# Altium PCB SRM_DOUBLE_V2_POWER.PCBDOC (part 2 of 2)
Units mil, origin at the board's own origin, x right, y up, seen from the top; angles counter-clockwise.
Board outline 17360 x 20010 mil, 2 copper layers (Top Layer, Bottom Layer); 233 components, 244 nets, 635 pads, 83 vias.
Unrouted connection lines stored in the file: 49.
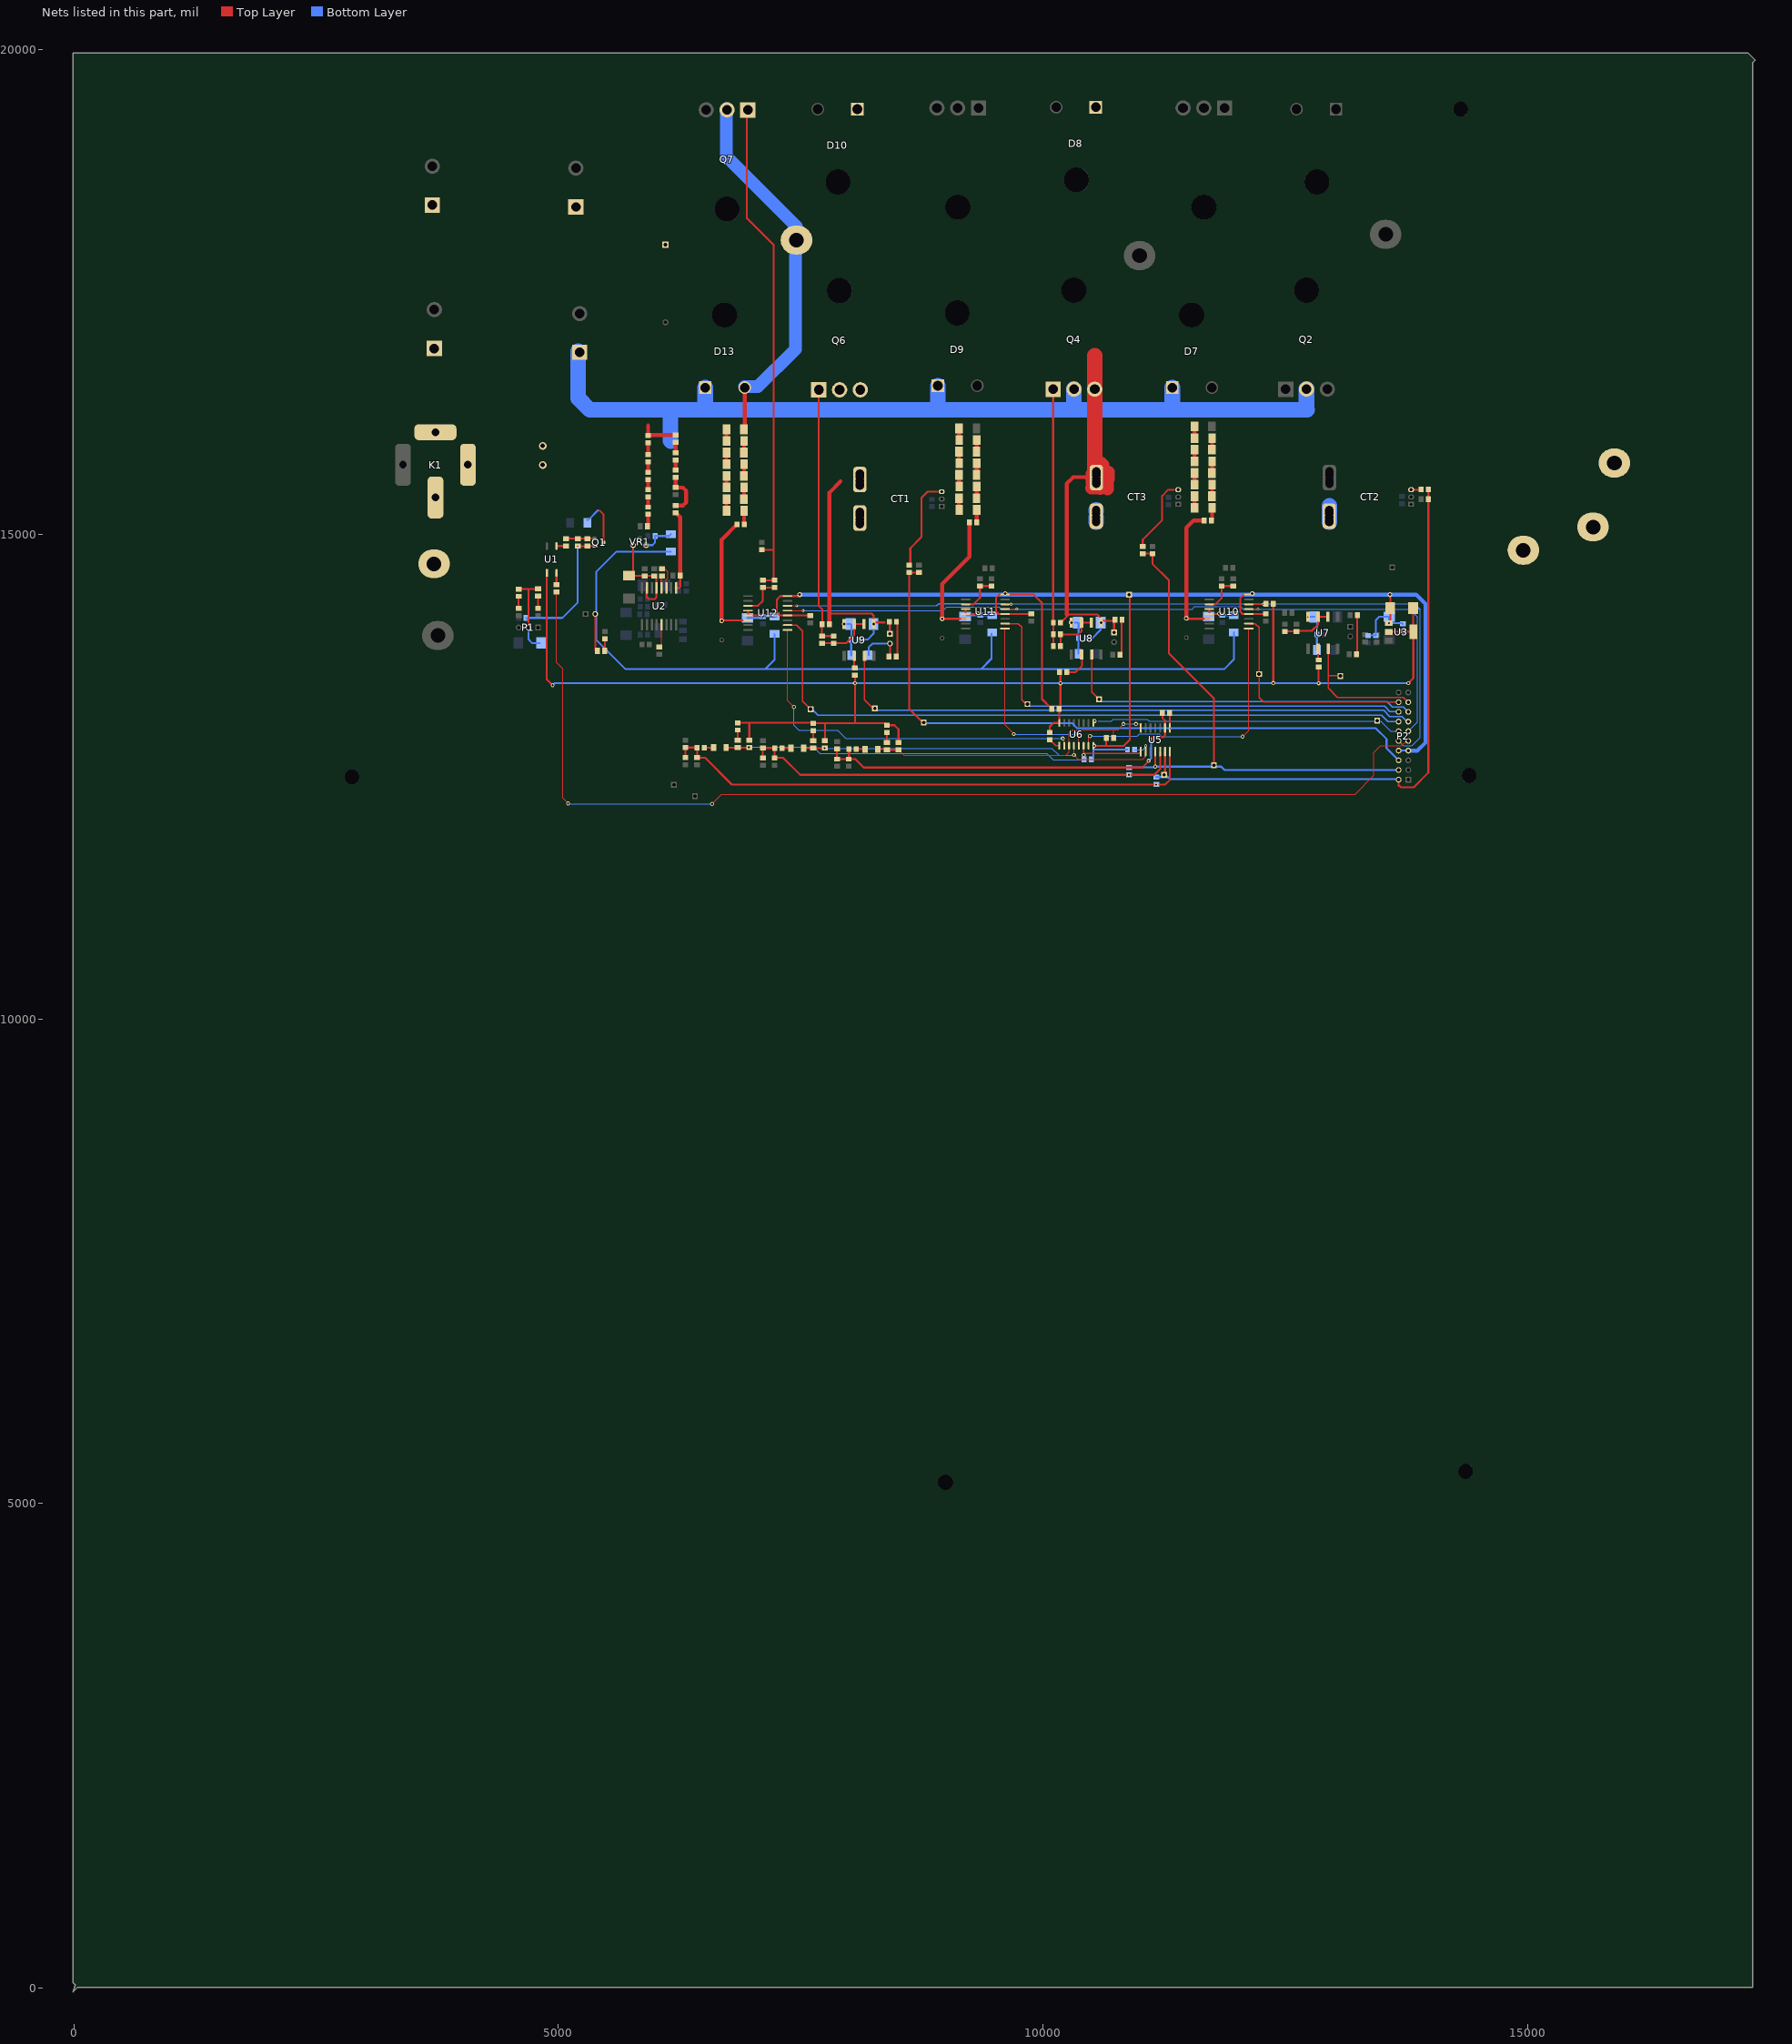
[diagram p2: the nets of this part, all layers, seen from the top]

## Via types
v1: diameter 40, hole 20, Top Layer to Bottom Layer, 55 vias
v2: diameter 50, hole 28, Top Layer to Bottom Layer, 17 vias
v3: diameter 30, hole 15, Top Layer to Bottom Layer, 10 vias
v4: diameter 20, hole 10, Top Layer to Bottom Layer, 1 vias

## Nets (pads, with @x,y where several pads share a name; then routed paths per layer and width w, separated by ;. In a path a pad name is that pad's centre, name@x,y a point inside that pad or via, vN(x,y) a via of type N, cw(c..) or ccw(c..) an arc to the next point about the centre after c; other vN are vias at no path point) (continued)
BP_G: Q4.1 R21.2 R48.1 R49.1 | length 2657.7
  Top Layer w20: R21.2@10105,14090 R21.2@10105,14092.6 ; Q4.1@10105,16504 R21.2@10105,14092.6 ; R49.1@10107.6,13850 R48.1@10107.6,13970 R21.2@10107.6,14090 R21.2@10105,14092.6
BP_S: C46.2 C49.2 CT3.4 D8.1 P4.1 Q4.3 R21.1 R45.1 U8.5 | length 4927.1
  Top Layer w20: R21.1@10182.4,14090 10250,14157.6 10250,14170 10250,14180 ; 10267.4,14175 10560,14175 10598.68,14136.32 v2(10598.68,14091.67) 10617.02,14110 R45.1@10727.6,14110 ; P4.1@10734,13990 10734,14107.4 R45.1@10736.6,14110
  Top Layer w40: 10250,14170 10245,14175 10245,15524 10313,15592 10461.39,15592 10484.19,15569.19 10496.69,15556.69 10507.69,15545.7 10518.49,15556.51 10528.49,15566.51 CT3.4@10543.99,15582.01
  Top Layer w130: CT3.4@10502.79,15480 10551,15480 10560,15480 10577.5,15497.5 10587.5,15507.5 10590,15510 10590,15475 10595,15480 10605,15490 10620,15505 10620,15524 10620,15544 10620,15575 10620,15611 ; CT3.4@10510,15535 10507.69,15537.31 10507.69,15544 10507.69,15545.7 10507.69,15575 CT3.4@10507.69,15582.01 ; CT3.4@10534.13,15591.87 CT3.4@10543.99,15582.01 ; CT3.4@10534.13,15636 CT3.4@10534.13,15650 ; CT3.4@10549.13,15590.87 CT3.4@10550,15590 ; CT3.4@10549.13,15636 CT3.4@10549.13,15650 ; CT3.4@10551,15575 CT3.4@10543.99,15582.01 ; CT3.4@10560,15611 10620,15611 ; 10590,15740 10600.77,15740 10620,15720.77 10620,15650 10620,15636 10620,15611 ; 10665,15470 10665,15524 10665,15544 10665,15561 10677,15573 10677,15575 10677,15611 10677,15636 10677,15645 10643,15611 10620,15611 ; CT3.4@10507.69,15582.01 10502.99,15582.01 CT3.4@10507.69,15586.7 ; CT3.4@10507.69,15582.01 CT3.4@10543.99,15582.01 ; CT3.4@10507.69,15582.01 CT3.4@10507.69,15586.7 ; CT3.4@10507.69,15586.7 10507.99,15587.01 10510,15589.01 10510,15611 10510,15630 10507.69,15627.69 10507.69,15611 CT3.4@10507.69,15586.7
  Top Layer w160: CT3.4@10534.13,15650 10534.13,16504 10534.13,16844.13
  Bottom Layer w20: C49.2@10442.4,13930 10510,13930 10596,14016 C46.2@10596,14091
CN_D: D13.3 D43.2 Q7.2 T9.1 | length 3908.7
  Top Layer w40: D43.2@6914,16085 6923,16094 D13.3@6923,16516
  Bottom Layer w130: Q7.2@6734,19396 6734,18900 7456.85,18177.15 T9.1@7456.85,18037.76 ; D13.3@6918,16525 7059,16525 7446,16912 T9.1@7446,18040
CN_G: Q7.1 R28.2 R62.1 R63.1 | length 5196
  Top Layer w20: Q7.1@6945,19381 6945,18265 7220,17990 ; R28.2@7100,14842.6 7219.8,14842.6 7222.4,14840 ; R62.1@7110,14527.4 R63.1@7230,14527.4 ; R63.1@7222.4,14535 7222.4,17982.6
CP1: P2.12 TP1.1 U6.9 | length 3177.9
  Bottom Layer w10: 10571.21,13075 10707,13075 10726,13094 11075,13094 11094,13075 TP1.1@13445.8,13075 ; TP1.1@13433,13092 13447.5,13077.5 13450,13075 13485,13075 13590,12970 P2.12@13670,12970
  other v1: 10535,13075
CP2: 
CP15V+: D22.1 D23.1 P5.2 | length 396.6
  Top Layer w20: P5.2@8421,13875 8422.6,13873.4 D23.1@8422.6,13755
  Bottom Layer w20: D22.1@8201,13755 8201,13834 8242,13875 8381,13875
CP_G: Q6.1 R25.2 R50.1 R51.1 | length 2669.8
  Top Layer w20: Q6.1@7685,16504 7685,14267.6 7722.6,14230 R25.2@7722.6,14075 ; R25.2@7720,14057.6 R51.1@7720,13952.4 R50.1@7840,13952.4
CP_S: C47.2 C50.2 CT1.4 D10.1 P5.1 Q6.3 R25.1 R52.1 U9.5 | length 2600
  Top Layer w20: 7797.4,14185 8230,14185 8253.68,14161.32 v2(8253.68,14076.67) 8269.42,14092.4 8367.12,14092.4 ; R52.1@8413.6,14092.4 R52.1@8421,14092.4 ; P5.1@8421,13975 R52.1@8421,14092.4 ; R52.1@8423.6,14095 8421.1,14092.5 R52.1@8421,14092.4
  Top Layer w40: R25.1@7797.4,14075 7797.4,14185 7797.4,15433.4 7911.5,15547.5
  Bottom Layer w20: C50.2@8097.4,13915 8190,13915 8253.68,13978.68 8253.68,14073.32 8252.01,14074.99 C47.2@8251,14076
D+3.3VA: C13.2 C15.1 C37.2 R29.2 R30.2 R31.2 R32.2 R33.2 R39.2 R40.2 R41.2 R42.2 R43.2 R54.2 U1.1 U3.2 U3.4 U6.16 | length 15429.5
  Top Layer w20: U1.1@4880,14605 4880,13505 v1(4940,13445) ; R32.2@6850,13057.4 6970,13057.4 ; R30.2@6970,12877.4 6970,13057.4 ; R29.2@7750,12872.4 7750,13052.4 ; R43.2@8060,13547.6 v1(8060,13465.72) 8060,13052.4 ; R39.2@8510,12852.4 8510,12990 8467.6,13032.4 R40.2@8390,13032.4 8370,13052.4 8060,13052.4 ; R33.2@10070,12957.4 10070,13015 10111.22,13056.22 U6.16@10170,13056.22 10167.4,13058.82 C37.2@10167.4,13200 10180,13212.6 v1(10180,13465) R42.2@10180,13572.6 ; v1(12377.4,13467.4) R54.2@12377.4,14285 ; v1(12845,13465) R41.2@12845,13610 ; U3.2@13570.06,13995.26 v1(13720,13995.26) U3.4@13822.94,13995.26 ; v1@13765,13460 v1(13770.72,13465.72) 13822.94,13517.94 U3.4@13822.94,13995.26 ; C15.1@13820,14241 13820,13999.54 U3.4@13823.61,13995.93 U3.4@13822.94,13995.26 ; 6970,13057.4 7625,13057.4 R31.2@7630,13052.4 7750,13052.4 ; 7750,13052.4 8060,13052.4
  Bottom Layer w20: v1(4940,13445) 4960.72,13465.72 v1(8060,13465.72) 10180,13465.72 12377.4,13465.72 12845,13465.72 v1(13770.72,13465.72) ; C13.2@13715,14002.6 C13.2@13720,14002.6
D+3.3VB: 
DA: C34.2 D12.1 D15.2 R30.1 U5.1 U6.6 | length 4458.9
  Top Layer w12: U6.6@10420,12820 v1@10420,12740 ; U5.1@11010,12760 10990,12740 v1@10420,12740 ; v1@10420,12730 10422.5,12727.5 10425,12725 v1(10420,12725) v1@10420,12730 ; v1@10420,12730 v1@10420,12740
  Top Layer w20: D12.1@6731,12800 6850,12800 6965,12800 6967.4,12800 6968.7,12801.3 R30.1@6970,12802.6
  Bottom Layer w10: v1(6965,12805) 7635,12805 7700,12740 10040,12740 10105,12675 10417.6,12675 C34.2@10422.6,12680
DB: C33.2 D11.1 D14.2 R29.1 U5.2 U6.4 | length 3884.9
  Top Layer w10: U6.4@10320,12820 v1(10320,12725) 10365,12680 11030,12680 11060,12710 U5.2@11060,12760
  Top Layer w20: D11.1@7531,12795 D14.2@7626.4,12795 ; D14.2@7630,12798.6 D14.2@7626.4,12795 ; R29.1@7750,12797.6 v1(7747.4,12795) 7630,12795 D14.2@7626.4,12795
  Bottom Layer w10: v1(7747.4,12795) 10090,12795 10165,12720 10315,12720 v1(10320,12725) ; C33.2@10947.4,12780 11035,12780 11055,12800 11055,12815 v3(11060,12820)
DC: C44.2 D16.1 D17.2 R39.1 U5.14 U6.3 | length 3111
  Top Layer w10: R39.1@8510,12777.6 8567.6,12720 10235,12720 10270,12755 U6.3@10270,12820 10270,12950 10306,12986 10727.4,12986 ; C44.2@10727.4,12900 10727.4,12986 ; v1@10830,13040 10776,12986 10727.4,12986 ; v1(10960,13045) U5.14@11010,13045 ; U5.14@11010,13004.09 U5.14@11010,13040
  Top Layer w20: D16.1@8295,12786 D16.1@8296,12785 8383.6,12785 D17.2@8390,12778.6 8509,12778.6 R39.1@8510,12777.6
  Bottom Layer w10: v1(10830,13045) v1(10960,13045)
DU: 
DV: 
DW: 
GND12: C5.2 C6.1 C7.2 D3.1 P1.2 Q1.2 R4.1 R5.1 | length 2321.7
  Top Layer w20: R5.1@4590,14437.4 4789,14437.4 D3.1@4790,14438.4 ; P1.2@4690,14040 4690,14437.4 ; v4(5200,14880) 5297.4,14880 C6.1@5300,14882.6 Q1.2@5372.76,14882.6
  Bottom Layer w20: C5.2@4667.4,14140 C5.2@4690,14117.4 ; P1.2@4690,14030 4690,13921 4733,13878 C7.2@4810,13878 ; P1.2@4690,14040 C5.2@4690,14155 ; C5.2@4690,14140 5040,14140 5200,14300 v4(5200,14880)
GNDA: C13.1 C15.2 C16.1 C20.1 C24.2 C33.1 C34.1 C37.1 C44.1 C51.1 C52.1 C53.1 P2.7 P2.8 T8.1 U3.1 U6.8 U10.4 U10.8 U11.4 U11.8 U12.4 U12.8 | length 14983.6
  Top Layer w20: v2(7490,14380) 7475,14365 U12.8@7365,14365 7290,14365 7255,14330 7255,14195 7285,14165 U12.4@7365,14165 7597.4,14165 C53.1@7600,14162.4 ; C52.1@9880,14180 C52.1@9877.6,14180 ; C52.1@9880,14182.4 C52.1@9877.6,14180 ; C37.1@10092.6,13200 9990,13302.6 9990,14295 9905,14380 U11.8@9610,14380 9550,14380 9515,14345 9515,14205 9540,14180 U11.4@9610,14180 C52.1@9877.6,14180 ; U6.8@10520,12820 v1(10530,12820) 10835,12820 10895,12880 T8.1@10895,14380 ; 10652.6,12822.4 C44.1@10652.6,12900 ; U10.8@12125,14380 12075,14380 12035,14340 12035,14205 12060,14180 U10.4@12125,14180 12297.6,14180 C51.1@12300,14182.4 ; v2(13580,14380) 13584,14376 C15.2@13584,14241 U3.1@13584,14104
  Bottom Layer w20: C34.1@10520,12702.6 10520,12785 ; v1@10520,12815 10520,12785 ; C33.1@10872.6,12780 10525,12780 10520,12785 ; 13390,13957.4 C16.1@13435,13957.4 13435,14115 13471,14151 C24.2@13574,14151 13570.06,14147.06 v1(13570.06,14085.81) 13706.59,14085.81 C13.1@13715,14077.4 ; P2.8@13670,12770 P2.7@13770,12770
  Bottom Layer w40: v2(7490,14380) 9610,14380 T8.1@10890,14380 12160,14380 v2(13580,14380) 13850,14380 13950,14280 13950,12855 13865,12770 P2.7@13770,12770
  other v2: 9610,14390 12160,14390
GNDB: 
IA: C30.1 C40.2 P2.2 R37.2 T14.1 U5.6 | length 6134.4
  Top Layer w20: T14.1@11260,12520 U5.6@11260,12760 ; 13670,12405 P2.2@13670,12470 ; 13680,12405 13695,12390 13825,12390 13977.4,12542.4 C40.2@13977.4,15365 R37.2@13977.4,15465
  Bottom Layer w20: C30.1@11170,12497.4 11250,12497.4 11283.68,12497.4 11285.64,12499.36 ; T14.1@11265,12520 11285.64,12499.36 ; P2.2@13670,12475 11310,12475 11285.64,12499.36
IB: C29.1 C42.2 P2.4 R38.2 T15.1 U5.4 | length 5537.4
  Top Layer w20: R38.2@11010,14802.6 R38.2@11030,14802.6 C42.2@11130,14802.6 11130,14697.6 11300,14527.6 11300,13775 11765,13310 T15.1@11765,12620 T15.1@11765,12605 ; v1(11160,12605) U5.4@11160,12760
  Bottom Layer w20: C29.1@10890,12597.4 11142.4,12597.4 11155,12610 v1(11160,12605) 11765,12605 11840,12605 11875,12570 P2.4@13670,12570
IC: C35.1 C38.2 P2.6 R36.2 T13.1 U5.8 | length 6988.8
  Top Layer w20: C38.2@8720,14607.6 R36.2@8620,14607.6 8620,13200 8765,13055 T13.1@8770,13055 ; C35.1@11307.4,13160 11310,13157.4 U5.8@11310,13004.09
  Bottom Layer w20: T13.1@8770,13052.6 10302.4,13052.6 10355,13000 v3(11310,13000) 13435,13000 13545,12890 13545,12795 P2.6@13670,12670
IPU+: 
IPV+: 
IPW+: 
IU: 
IV: 
IW: 
N15V+: D1.1 D24.1 D25.1 D26.1 D27.1 P6.2 | length 9773.8
  Top Layer w20: D24.1@5381.6,13800 P6.2@5381.6,14179
  Bottom Layer w20: D1.1@6160,14824 5599,14824 5390,14615 5390,14180 5390,13915 5695,13610 9361,13610 ; 7135,13612 7230,13707 D27.1@7230,13974 ; D26.1@9470,13975 9470,13719 9361,13610 ; D25.1@11970,13989 11970,13710 11870,13610 9361,13610
NetC1_1: C1.1 U2.4 | length 127.2
  Top Layer w12: U2.4@6059,14450 6059,14561.6 C1.1@6070,14572.6
NetC1_2: C1.2 U2.3 | length 247.1
  Top Layer w10: C1.2@6070,14647.4 6097.6,14647.4 6130,14615 6130,14553.01 6109,14532.01 U2.3@6109,14450
NetC2_2: C2.2 D1.2 VR1.1 | length 341.8
  Bottom Layer w20: VR1.1@5905,14890 5970,14890 5997.4,14917.4 C2.2@5997.4,14985 6141,14985 D1.2@6160,15004
NetC4_1: C4.1 R2.2 U2.1 | length 836
  Top Layer w20: U2.1@6209,14450 U2.1@6214,14450 6245,14450 6257.4,14462.4 C4.1@6257.4,14575
  Top Layer w40: R2.2@6210,15225.2 6257.4,15177.79 C4.1@6257.4,14575
NetC6_2: C6.2 Q1.1 R3.1 R4.2 | length 292.8
  Top Layer w20: R3.1@5080,14957.4 R4.2@5200,14957.4 C6.2@5300,14957.4 Q1.1@5372.76,14957.4
NetC17_1: C17.1 C18.1 C19.1 C22.1 C25.2 D7.1 D9.1 D13.1 K1.1 Q2.2 Q4.2 Q6.2 R7.1 R10.2 R18.1 | length 9682.7
  Top Layer w40: R18.1@5925,16022.4 5920,16027.4 5925,16027.4 6207.6,16027.4 R10.2@6210,16025 ; 5925,16057.4 5925,16125
  Bottom Layer w160: C17.1@5205,16893 5205,16406 5326,16285 12725,16285 12719.57,16290.43 Q2.2@12719.57,16504 ; 6155,16230 6155,15970 6160,15965 ; 6515,16360 D13.1@6515,16516 ; 8915,16320 D9.1@8915,16536 ; 10319.57,16300.43 Q4.2@10319.57,16504 ; 11335,16320 D7.1@11335,16516
NetC29_2: C29.2 C31.2 R26.2 R102.2 R103.1 U5.5 | length 4572.6
  Top Layer w20: R103.1@7110,12692.4 7110,12782.6 7117.5,12790.1 7125,12797.6 R26.2@7230,12797.6 ; C31.2@7230,12692.4 7230,12795 R26.2@7230,12797.6 ; R26.2@7232.6,12795 R26.2@7230,12797.6 ; C31.2@7240,12695 7320,12695 7495,12520 v1(10885,12520) 11150,12520 11210,12580 U5.5@11210,12760
NetC30_2: C30.2 C32.2 R27.2 R100.2 R101.1 U5.7 | length 5638.2
  Top Layer w20: R101.1@6310,12697.4 R100.2@6310,12802.6 6430,12802.6 R27.2@6432.6,12800 6432.6,12700 C32.2@6430,12697.4 6512.6,12697.4 6790,12420 v1(11170,12420) 11260,12420 11310,12470 U5.7@11310,12760
NetC35_2: C35.2 C36.2 R35.2 R104.2 R105.1 U5.9 | length 4134.6
  Top Layer w20: R104.2@7875,12787.6 R105.1@7875,12682.4 C36.2@7995,12682.4 ; R35.2@7997.6,12785 7997.6,12685 C36.2@7995,12682.4 ; v1(11090,12665) 11090,12660 11025,12595 8150,12595 8062.6,12682.4 C36.2@7995,12682.4 ; v1(11105,12882) 11131,12908 11238,12908 11260,12930 U5.9@11260,13004.09 11260,13080 11232.6,13107.4 C35.2@11232.6,13160
  Bottom Layer w20: v1(11090,12665) 11115,12690 v1@11115,12881
NetC45_1: C45.1 C48.1 D20.2 U7.8 | length 379.7
  Bottom Layer w20: v3(12735,14150) C45.1@12800.65,14150 ; D20.2@12827.31,13808.33 12827.31,13966.73 C48.1@12828.91,13968.33 C45.1@12828.91,14121.73
NetC46_1: C46.1 C49.1 D21.2 U8.8 | length 380.7
  Bottom Layer w20: v2(10293.68,14091.67) 10359.33,14091.67 C46.1@10360,14091 ; D21.2@10366,13770 10366,13928.4 C49.1@10367.6,13930 C46.1@10367.6,14083.4
NetC47_1: C47.1 C50.1 D22.2 U9.8 | length 391.4
  Bottom Layer w20: v2(7948.68,14076.67) 8014.33,14076.67 C47.1@8015,14076 8022.6,14068.4 C50.1@8022.6,13915 8021,13913.4 D22.2@8021,13755
NetC54_1: C54.1 R55.2 U10.14 | length 1387.9
  Top Layer w20: C54.1@11480,14135 11485,14130 U10.14@11717.13,14130
  Top Layer w40: C54.1@11480,14135 11480,15070 11555,15145 R55.2@11662.6,15145
NetC55_2: C55.2 C60.1 D25.2 U10.12 U10.13 | length 413.7
  Top Layer w20: U10.12@11717.13,14230 U10.13@11717.13,14180 11815,14180 v2(11820,14185)
  Bottom Layer w20: C60.1@11717.13,14180 11820,14180 11837.4,14180 C55.2@11850,14167.4 11968.4,14167.4 D25.2@11970,14169
NetC56_1: C56.1 R56.2 U11.14 | length 1354.2
  Top Layer w20: C56.1@8960,14130 U11.14@9202.13,14130
  Top Layer w40: C56.1@8960,14130 8960,14490 9242.6,14772.6 R56.2@9242.6,15125
NetC57_2: C57.2 C61.1 D26.2 U11.12 U11.13 | length 435.9
  Top Layer w20: U11.12@9202.13,14230 U11.13@9202.13,14180 9320,14180 v2(9325,14185)
  Bottom Layer w20: C61.1@9214.72,14167.4 9325,14167.4 C57.2@9355,14167.4 9473.4,14167.4 D26.2@9475,14169
NetC58_1: C58.1 R57.2 U12.14 | length 1334.5
  Top Layer w20: C58.1@6685,14110 6690,14115 U12.14@6957.13,14115
  Top Layer w40: C58.1@6685,14110 6685,14947.4 R57.2@6842.6,15105
NetC59_2: C59.2 C62.1 D27.2 U12.12 U12.13 | length 459.7
  Top Layer w20: U12.12@6957.13,14215 U12.13@6957.13,14165 7075,14165 v2(7080,14160)
  Bottom Layer w20: C62.1@6951,14140 7080,14140 7097.6,14140 7098.8,14141.2 C59.2@7110,14152.4 7228.4,14152.4 D27.2@7230,14154
NetC63_2: 
NetC67_1: 
NetC76_2: 
NetC77_2: 
NetC82_2: 
NetC92_1: 
NetC93_1: 
NetC94_1: 
NetC101_1: 
NetC102_2: 
NetC103_1: 
NetC104_2: 
NetC105_1: 
NetC106_2: 
NetCT1_3: CT1.3 R36.1 | length 923.5
  Top Layer w20: R36.1@8631.02,14693.43 8631.02,14858.02 8747,14974 8747,15378 8810.85,15441.85 8911.46,15441.85
NetCT1_5: C+.1 CT1.5
NetCT2_3: CT2.3 R37.1 | length 103.9
  Top Layer w20: CT2.3@13800,15461.85 13899.45,15461.85 R37.1@13902.6,15465
NetCT2_5: A+.1 CT2.5 | length 316
  Bottom Layer w130: CT2.5@12955,15147 CT2.5@12955,15178 CT2.5@12955,15214 CT2.5@12955,15239 CT2.5@12955,15253 CT2.5@12955,15295
  Bottom Layer w160: CT2.5@12955,15127 CT2.5@12955,15147 CT2.5@12955,15178 CT2.5@12955,15214 CT2.5@12955,15239 CT2.5@12955,15253 CT2.5@12955,15295
NetCT3_3: CT3.3 R38.1 | length 753.7
  Top Layer w20: R38.1@11020,14875 R38.1@11020,14877.4 ; R38.1@11030,14877.4 11030,14948 11231,15149 11231,15399 11293.85,15461.85 11351.46,15461.85
NetCT3_5: B+.1 CT3.5 | length 116
  Bottom Layer w130: CT3.5@10550,15127 CT3.5@10550,15147 CT3.5@10550,15178
  Bottom Layer w160: CT3.5@10550,15127 CT3.5@10550,15147 CT3.5@10550,15178 ; CT3.5@10550,15239 CT3.5@10550,15253
NetCT4_3: 
NetCT4_5: 
NetCT5_3: 
NetCT5_5: 
NetCT6_3: 
NetCT6_5: 
NetD2_2: D2.2 R5.2 | length 126.2
  Top Layer w20: D2.2@4590,14236.4 R5.2@4590,14362.6
NetD3_2: D3.2 R6.2 | length 126.2
  Top Layer w20: R6.2@4790,14237.4 D3.2@4790,14363.6
NetD4_1: D4.1 K1.3 Q1.3 | length 502.3
  Top Layer w20: 5425,15246 5467.24,15203.76 Q1.3@5467.24,14920
  Bottom Layer w20: D4.1@5293,15150 5301,15150 5309,15150 5410,15251
NetD5_1: D5.1 R15.1 | length 123.3
  Top Layer w40: R15.1@5925,15207.6 5925,15086.6 D5.1@5926.6,15085
NetD11_2: D11.2 R26.1 | length 93.6
  Top Layer w20: R26.1@7307.4,12795 D11.2@7401,12795
NetD12_2: D12.2 R27.1 | length 93.6
  Top Layer w20: R27.1@6507.4,12800 D12.2@6601,12800
NetD14_1: D14.1 R31.1 | length 104.2
  Top Layer w20: D14.1@7630,12873.4 R31.1@7630,12977.6
NetD15_1: D15.1 R32.1 | length 104.2
  Top Layer w20: D15.1@6850,12878.4 R32.1@6850,12982.6
NetD16_2: D16.2 R35.1 | length 93.6
  Top Layer w20: R35.1@8072.4,12785 D16.2@8166,12785
NetD17_1: D17.1 R40.1 | length 104.2
  Top Layer w20: D17.1@8390,12853.4 R40.1@8390,12957.6
NetD18_2: D18.2 R44.2 | length 406.4
  Top Layer w20: D18.2@13236.4,13765 13242.72,13771.31 13242.72,14167.33 R44.2@13243.72,14168.33
NetD19_2: D19.2 R45.2 | length 340.4
  Top Layer w20: D19.2@10810.4,13770 10810.4,14109 R45.2@10811.4,14110
NetD23_2: D23.2 R52.2 | length 340.4
  Top Layer w20: D23.2@8497.4,13755 8497.4,14094 R52.2@8498.4,14095
NetD24_2: D24.2 R53.2 | length 124.1
  Top Layer w20: D24.2@5476.4,13800 5480,13803.6 R53.2@5480,13922.6
NetD28_1: D28.1 D29.2 | length 120.8
  Top Layer w40: D29.2@11744,15875 11746,15877 D28.1@11746,15995
NetD28_2: D28.2 D37.1 | length 120.8
  Top Layer w40: D37.1@11564,16115 11564,15997 D28.2@11566,15995
NetD29_1: D29.1 D38.2 | length 120.8
  Top Layer w40: D29.1@11564,15875 11564,15757 D38.2@11566,15755
NetD30_1: D30.1 R55.1 | length 133.6
  Top Layer w40: R55.1@11737.4,15145 11746,15153.6 D30.1@11746,15275
NetD30_2: D30.2 D39.1 | length 120.8
  Top Layer w40: D39.1@11564,15395 11564,15277 D30.2@11566,15275
NetD31_1: D31.1 D32.2 | length 120.8
  Top Layer w40: D32.2@9314,15855 9316,15857 D31.1@9316,15975
NetD31_2: D31.2 D40.1 | length 120.8
  Top Layer w40: D40.1@9134,16095 9134,15977 D31.2@9136,15975
NetD32_1: D32.1 D41.2 | length 120.8
  Top Layer w40: D32.1@9134,15855 9134,15737 D41.2@9136,15735
NetD33_1: D33.1 R56.1 | length 123
  Top Layer w40: R56.1@9315,15132.4 9316,15133.4 D33.1@9316,15255
NetD33_2: D33.2 D42.1 | length 120.8
  Top Layer w40: D42.1@9134,15375 9134,15257 D33.2@9136,15255
NetD34_1: D34.1 D35.2 | length 120.8
  Top Layer w40: D35.2@6914,15845 6916,15847 D34.1@6916,15965
NetD34_2: D34.2 D43.1 | length 120.8
  Top Layer w40: D43.1@6734,16085 6734,15967 D34.2@6736,15965
NetD35_1: D35.1 D44.2 | length 131.2
  Top Layer w40: D35.1@6735,15855 6735,15846 D35.1@6734,15845 6734,15727 D44.2@6736,15725
NetD36_1: D36.1 R57.1 | length 123
  Top Layer w40: R57.1@6915,15122.4 6916,15123.4 D36.1@6916,15245
NetD36_2: D36.2 D45.1 | length 120.8
  Top Layer w40: D45.1@6734,15365 6734,15247 D36.2@6736,15245
NetD38_1: D38.1 D46.2 | length 120.8
  Top Layer w40: D46.2@11744,15635 11746,15637 D38.1@11746,15755
NetD39_2: D39.2 D47.1 | length 120.8
  Top Layer w40: D39.2@11744,15395 11746,15397 D47.1@11746,15515
NetD41_1: D41.1 D48.2 | length 120.8
  Top Layer w40: D48.2@9314,15615 9316,15617 D41.1@9316,15735
NetD42_2: D42.2 D49.1 | length 120.8
  Top Layer w40: D42.2@9314,15375 9316,15377 D49.1@9316,15495
NetD44_1: D44.1 D50.2 | length 120.8
  Top Layer w40: D50.2@6914,15605 6916,15607 D44.1@6916,15725
NetD45_2: D45.2 D51.1 | length 120.8
  Top Layer w40: D45.2@6914,15365 6916,15367 D51.1@6916,15485
NetD46_1: D46.1 D47.2 | length 120.8
  Top Layer w40: D46.1@11564,15635 11564,15517 D47.2@11566,15515
NetD48_1: D48.1 D49.2 | length 120.8
  Top Layer w40: D48.1@9134,15615 9134,15497 D49.2@9136,15495
NetD50_1: D50.1 D51.2 | length 120.8
  Top Layer w40: D50.1@6734,15605 6734,15487 D51.2@6736,15485
NetD52_1: 
NetD53_1: 
NetD59_2: 
NetD60_2: 
NetD62_1: 
NetD63_1: 
NetD64_2: 
NetD65_1: 
NetD66_2: 
NetD67_2: 
NetD71_2: 
NetD75_1: 
NetD75_2: 
NetD76_1: 
NetD77_1: 
NetD77_2: 
NetD78_1: 
NetD78_2: 
NetD79_1: 
NetD80_1: 
NetD80_2: 
NetD81_1: 
NetD81_2: 
NetD82_1: 
NetD83_1: 
NetD83_2: 
NetD85_1: 
NetD86_2: 
NetD88_1: 
NetD89_2: 
NetD91_1: 
NetD92_2: 
NetD93_1: 
NetD95_1: 
NetD97_1: 
NetF1_1: 
NetF1_2: K1.4 R7.2 V+.1
NetF2_1: 
NetF2_2: 
NetR1_1: R1.1 U1.3 | length 122.6
  Top Layer w20: R1.1@4980,14482.4 U1.3@4980,14605
NetR3_2: R3.2 U1.4 | length 100.8
  Top Layer w20: U1.4@4980,14880.59 5077.99,14880.59 R3.2@5080,14882.6
NetR8_1: R8.1 U2.13 | length 242.5
  Top Layer w10: R8.1@6040,13837.4 6064,13861.4 U2.13@6064,14070
NetR10_1: R10.1 R11.2 | length 105.2
  Top Layer w40: R11.2@6210,15845 R10.1@6210,15950.2
NetR11_1: R11.1 R12.2 | length 105.2
  Top Layer w40: R12.2@6210,15665 R11.1@6210,15770.2
NetR14_1: R14.1 R15.2 | length 105.2
  Top Layer w40: R15.2@5925,15282.4 R14.1@5925,15387.6
NetR14_2: R14.2 R16.2 | length 105.2
  Top Layer w40: R14.2@5925,15462.4 R16.2@5925,15567.6
NetR16_1: R16.1 R17.2 | length 105.2
  Top Layer w40: R16.1@5925,15642.4 R17.2@5925,15747.6
NetR17_1: R17.1 R18.2 | length 125.2
  Top Layer w40: R17.1@5925,15822.4 R18.2@5925,15947.6
NetR33_1: R33.1 U6.1 | length 125.9
  Top Layer w12: R33.1@10070,12882.6 10132.6,12820 U6.1@10170,12820
NetR41_1: R41.1 U7.2 | length 116.9
  Top Layer w20: U7.2@12840,13820 12840,13712.05 R41.1@12846.31,13705.73
NetR42_1: R42.1 U8.2 | length 302.4
  Top Layer w20: R42.1@10247.4,13580 10337.6,13580 10405,13647.4 10405,13755.35 U8.2@10398.68,13761.67
NetR43_1: R43.1 U9.2 | length 126.9
  Top Layer w20: U9.2@8053.68,13746.67 8053.68,13628.72 R43.1@8060,13622.4
NetR46_2: R46.2 R47.2 U7.6 U7.7 | length 539.1
  Top Layer w20: R46.2@12496.32,14000.93 R47.2@12616.31,14000.93 ; R47.2@12626.31,14005.73 12773.72,14005.73 12840,14072.02 U7.7@12840,14150 U7.6@12940,14150
NetR48_2: R48.2 R49.2 U8.6 U8.7 | length 538.2
  Top Layer w20: R49.2@10182.4,13850 R48.2@10182.4,13970 10365,13970 10398.68,14003.68 U8.7@10398.68,14091.67 U8.6@10498.68,14091.67
NetR50_2: R50.2 R51.2 U9.6 U9.7 | length 582.3
  Top Layer w20: R51.2@7720,13877.6 R50.2@7840,13877.6 7967.6,13877.6 8053.68,13963.68 U9.7@8053.68,14076.67 U9.6@8153.68,14076.67
NetR58_2: R58.2 R59.2 U10.11 | length 397.4
  Top Layer w20: U10.11@11717.13,14280 11780,14280 11845,14345 R58.2@11845,14467.6 R59.2@11965,14467.6
NetR60_2: R60.2 R61.2 U11.11 | length 431.5
  Top Layer w20: U11.11@9202.13,14280 9285,14280 9350,14345 R60.2@9350,14467.6 ; R60.2@9340,14457.6 R60.2@9350,14467.6 ; R61.2@9470,14467.6 R60.2@9350,14467.6
NetR62_2: R62.2 R63.2 U12.11 | length 431.2
  Top Layer w20: U12.11@6957.13,14265 7060,14265 7110,14315 R62.2@7110,14452.6 R63.2@7230,14452.6
NetR64_1: 
NetR65_2: 
NetR68_1: 
NetR68_2: 
NetR70_1: 
NetR71_1: 
NetR87_1: 
NetR95_1: 
NetR96_1: 
NetR97_1: 
NetR111_2: 
NetR113_2: 
NetR115_2: 
NetR300_2: 
NetR302_2: 
NetR304_2: 
OCA: U6.7 U10.1 | length 2885.7
  Top Layer w10: U6.7@10470,12820 10470,12905 v1(10485,12920) ; v1@12065,12928 12078,12928 12125,12975 U10.1@12125,14030
  Bottom Layer w10: v1@10481,12934 10485,12934 10497.5,12934 10498.25,12933.25 10514,12917.5 ; v1@10487.5,12917.5 10514,12917.5 ; v1@12057,12925 v1@12060,12928 ; v1@12065,12920 v1(12060,12915) 11227,12915 11200,12942 10998,12942 10973.5,12917.5 10514,12917.5
OCB: U6.5 U11.1 | length 1898.8
  Top Layer w10: U11.1@9610,14030 9610,13035 9702.5,12942.5 v1@9705,12940 ; v1(10335,12940) 10370,12905 U6.5@10370,12820
  Bottom Layer w10: v1(9700,12940) v1(10335,12940)
OCC: U6.2 U12.1 | length 3922.6
  Top Layer w10: U12.1@7365,14015 7365,13285 v1(7430,13220) ; v1(10205,12895) 10220,12880 U6.2@10220,12820
  Bottom Layer w10: v1(7430,13220) 7430,13030 7480,12980 7880,12980 7965,12895 10200,12895 v1@10202.5,12892.5
OCU: 
OCV: 
OCW: 
P_5V: C3.1 C8.1 C9.2 U2.5 U2.7 VR1.3 | length 1039
  Top Layer w20: VR1.3@5770,14890 5770,14616 C8.1@5729,14575 C9.2@5887.6,14575 ; C9.2@5890,14572.6 C9.2@5887.6,14575 ; U2.7@5909,14450 5909,14356 5932,14333 5993,14333 6009,14349 6009,14450 6009,14553.6 C3.1@5990,14572.6 5987.6,14575 5890,14575 C9.2@5887.6,14575
PDPINTA: P2.10 R54.1 U10.6 U11.6 U12.6 | length 8363.7
  Top Layer w10: U12.6@7365,14265 v3(7460,14265)
  Top Layer w12: U10.6@12125,14280 v3(12270,14280) 12297.6,14280 R54.1@12302.6,14285
  Bottom Layer w10: v3(7460,14265) 8905,14265 ; 9610,14285 9670,14285 12270,14285 13835,14285 ; P2.10@13670,12870 13720,12820 13810,12820 13895,12905 13895,14225
  Bottom Layer w12: 8905,14265 8925,14285 9610,14285 ; P2.10@13670,12870 P2.10@13670,12890 ; 13835,14285 13895,14225
  other v3: 9670,14280
PDPINTB: 
PWM1: P2.17 TP2.1 U7.3 | length 1417.1
  Top Layer w12: U7.3@12945,13820 12945,13545 ; TP2.1@13070,13540 13065,13545 12945,13545 ; P2.17@13770,13270 13720,13320 13040,13320 12945,13415 12945,13545
PWM2: P2.18 T16.1 U10.2 | length 2302.3
  Top Layer w12: U10.2@12125,14080 12190,14080 12230,14040 T16.1@12230,13560 12230,13320 12280,13270 P2.18@13670,13270
PWM3: P2.15 TP3.1 U8.3 | length 3737.1
  Top Layer w12: U8.3@10503.68,13761.67 10503.68,13376.32 TP3.1@10580,13300
  Bottom Layer w12: TP3.1@10580,13300 10605,13275 13550,13275 13605,13220 13720,13220 P2.15@13770,13170
PWM4: P2.16 T17.1 U11.2 | length 4876.3
  Top Layer w12: U11.2@9610,14080 9745,14080 9780,14045 9780,13295 9832.5,13242.5 T17.1@9845,13230
  Bottom Layer w12: T17.1@9840,13235 9845,13230 13525,13230 13580,13175 P2.16@13665,13175
PWM5: P2.13 TP4.1 U9.3 | length 6158.3
  Top Layer w12: U9.3@8158.68,13746.67 8158.68,13296.32 8257.5,13197.5 TP4.1@8265,13190
  Bottom Layer w12: TP4.1@8260,13185 8265,13185 13515,13185 13580,13120 13705,13120 13755,13070 P2.13@13770,13070
PWM6: P2.14 T18.1 U12.2 | length 7141.8
  Top Layer w12: U12.2@7365,14065 7460,14065 7520,14005 7520,13280 T18.1@7602.5,13197.5
  Bottom Layer w12: T18.1@7602.5,13197.5 7617.5,13197.5 7680,13135 13495,13135 13560,13070 P2.14@13670,13070
PWM7: 
PWM8: 
PWM9: 
PWM10: 
PWM11: 
PWM12: 
RELAY1: P2.9 R1.2 | length 11321.5
  Top Layer w10: R1.2@4980,14407.6 4980,13680 5045,13615 5045,12280 v1(5100.19,12224.81) ; v1(6585,12220) 6685,12320 13220,12320 13415,12515 13415,12750 13486,12821 13701,12821 13750,12870 P2.9@13770,12870
  Bottom Layer w10: v1@5105,12220 v1(6585,12220) v1@6590,12225 ; P2.9@13760,12870 P2.9@13770,12870
RELAY2: 
RST1: P2.11 U10.5 U11.5 U12.5 | length 8005.3
  Top Layer w10: U12.5@7365,14215 v3(7525,14215) ; U11.5@9610,14230 v3(9730,14230) ; U10.5@12125,14230 v3(12220,14230)
  Bottom Layer w10: v3(7525,14215) 8970,14215 9005,14250 9545,14250 9565,14230 v3(9730,14230) 11540,14230 11565,14255 11605,14255 ; 11610.64,14255 12040,14255 12065,14230 v3(12220,14230) 13785,14230 13865,14150 13865,13065 P2.11@13770,12970
RST2: 
UN_D: 
UN_G: 
UP15V+: 
UP_G: 
VDC: R2.1 R12.1 R13.2 | length 468.9
  Top Layer w40: R2.1@6210,15300 6287,15300 6319,15332 6319,15450 6284,15485 R13.2@6210,15485 R12.1@6210,15590.2
VN_D: 
VN_G: 
VP15V+: 
VP_G: 
WN_D: 
WN_G: 
WP15V+: 
WP_G: 
pads on no net: D6. D7. D8. D9. D10. D13. Q2. Q3. Q4. Q5. Q6. Q7. U2.6 U2.12 U5.10 U5.11 U5.13 U6.10 U6.11 U6.12 U6.13 U6.14 U6.15 U7.1 U7.4 U8.1 U8.4 U9.1 U9.4 U10.7 U10.15 U11.7 U11.15 U12.7 U12.15

## Polygon pours and split planes (outlines as drawn)
AN_S on Top Layer "Top Layer-No Net" (hatched 90Degree grid 12 track 12, remove dead copper, pour order 1001): 3622,15597 3601,15576 3326,15576 3326,15231 3452,15105 3550,15007 4263,15007 4305,15049 4305,15337 4304,15338 4304,15389 4304,15392 4259,15437 4252,15444 3825,15444 3806,15463 3804,15465 3804,15492 3800,15496 3800,15542 3758,15584 3744,15570 3362,15570
NetC17_1 on Bottom Layer "Top Layer-No Net" (hatched 90Degree grid 12 track 12, pour order 1027): 6040,15770 6186,15916 6214,15916 6214,15906 6310,15810 6270,15770 6055,15770

## Keep-outs
Keep-Out Layer:
  lines w10: 2689,5328 2689,5330.5 2689,19292 ; 2689,5343 2689,5189 2828,5050 3917,5050 14261,5050 14502,5050 14511,5059 14652,5200 14652,5471 14654,15020 14654,19505 14475,19684 14002,19684 3905,19684 2790,19684 2689,19583 2689,19281

## Silkscreen, mask and mechanical layers (free items; w line width, h text height)
Top Overlay:
  text "+" at 5440,14145 h60
  text "+" at 4490,14005 h60
  text "+" at 13230,13890 h60
  text "+" at 10834,13865 h60
  text "+" at 8521,13815 h60

## Text inside footprints (layer, text, board x,y; h text height)
D6: Top Overlay "3" at 12738,19554 h59.06 r180; Top Overlay "1" at 12928,19554 h59.06 r180
D7: Top Overlay "3" at 11622,16351 h59.06; Top Overlay "1" at 11432,16351 h59.06
D8: Top Overlay "3" at 10258,19574 h59.06 r180; Top Overlay "1" at 10448,19574 h59.06 r180
D9: Top Overlay "3" at 9202,16371 h59.06; Top Overlay "1" at 9012,16371 h59.06
D10: Top Overlay "3" at 7798,19554 h59.06 r180; Top Overlay "1" at 7988,19554 h59.06 r180
D13: Top Overlay "3" at 6802,16351 h59.06; Top Overlay "1" at 6612,16351 h59.06
P2: Top Overlay "20" at 13690,13430 h50 r90; Top Overlay "19" at 13790,13430 h50 r90; Top Overlay "1" at 13790,12370 h50 r90; Top Overlay "2" at 13690,12370 h50 r90
Q2: Top Overlay "3" at 12914.13,16318.88 h59.06; Top Overlay "2" at 12699.57,16318.88 h59.06; Top Overlay "1" at 12505,16318.88 h59.06
Q3: Top Overlay "3" at 11465.87,19581.12 h59.06 r180; Top Overlay "2" at 11680.43,19581.12 h59.06 r180; Top Overlay "1" at 11875,19581.12 h59.06 r180
Q4: Top Overlay "3" at 10514.13,16318.88 h59.06; Top Overlay "2" at 10299.57,16318.88 h59.06; Top Overlay "1" at 10105,16318.88 h59.06
Q5: Top Overlay "3" at 8925.87,19581.12 h59.06 r180; Top Overlay "2" at 9140.43,19581.12 h59.06 r180; Top Overlay "1" at 9335,19581.12 h59.06 r180
Q6: Top Overlay "3" at 8096.13,16312.88 h59.06; Top Overlay "2" at 7881.57,16312.88 h59.06; Top Overlay "1" at 7687,16312.88 h59.06
Q7: Top Overlay "3" at 6545.87,19561.12 h59.06 r180; Top Overlay "2" at 6760.43,19561.12 h59.06 r180; Top Overlay "1" at 6955,19561.12 h59.06 r180